# Altium PCB LCD-Controller.PcbDoc (part 1 of 3)
Units mm, origin at the board's own origin, x right, y up, seen from the top; angles counter-clockwise.
Board outline 100.3 x 38.1 mm, 4 copper layers (Top Layer, Signal Layer 1, Signal Layer 2, Bottom Layer), stack 0.778 mm thick; 118 components, 92 nets, 506 pads, 174 vias.
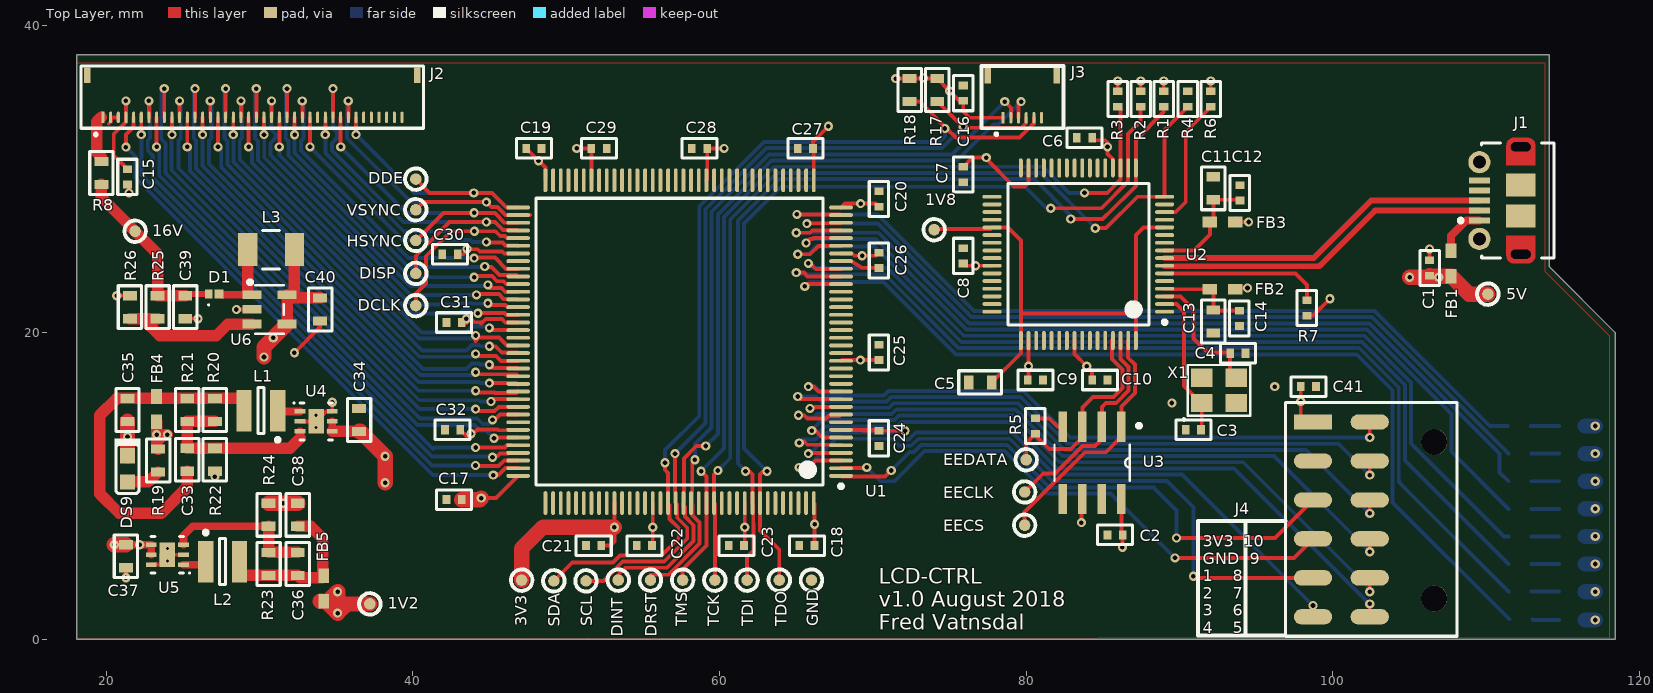
[diagram p0: Top Layer view]
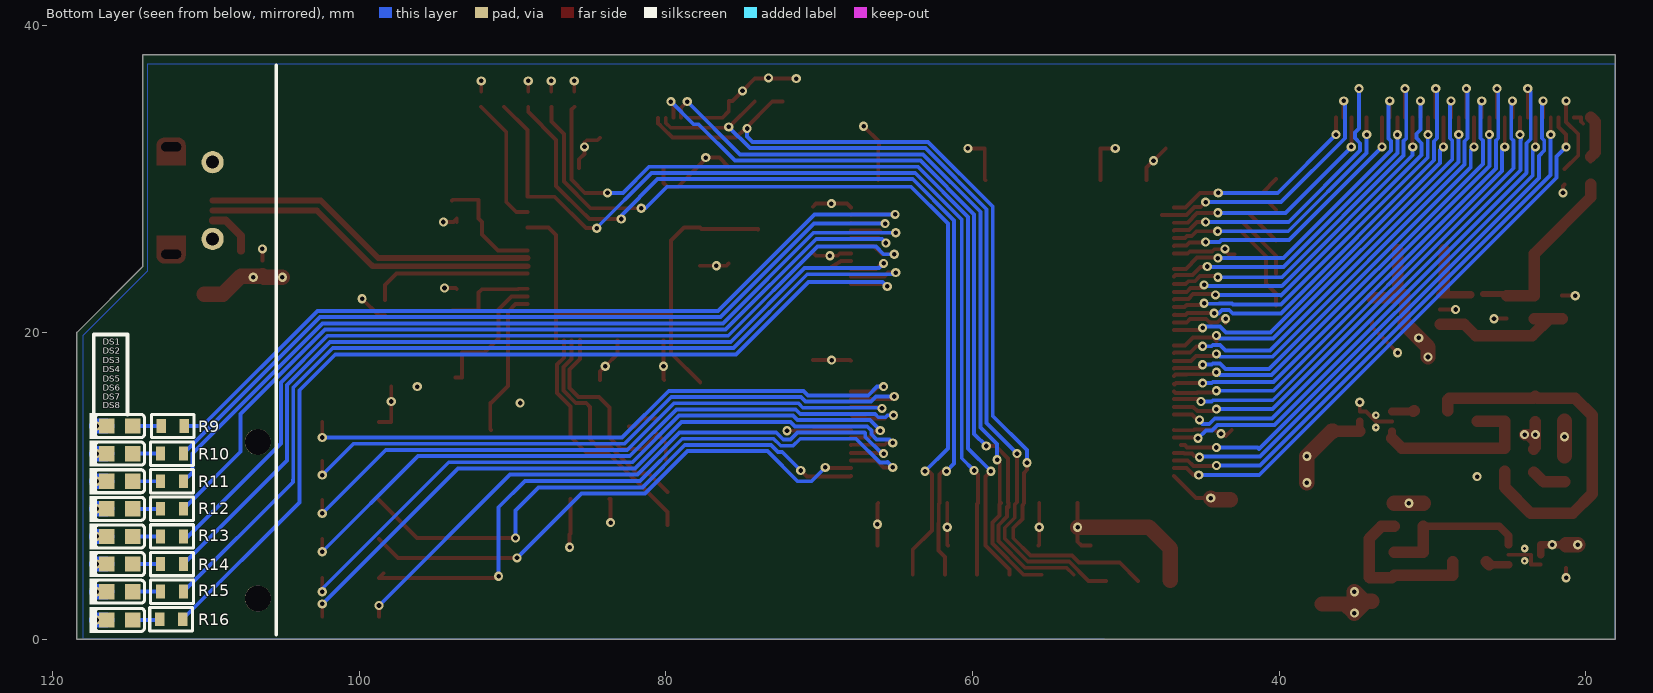
[diagram p1: Bottom Layer view, seen from below]
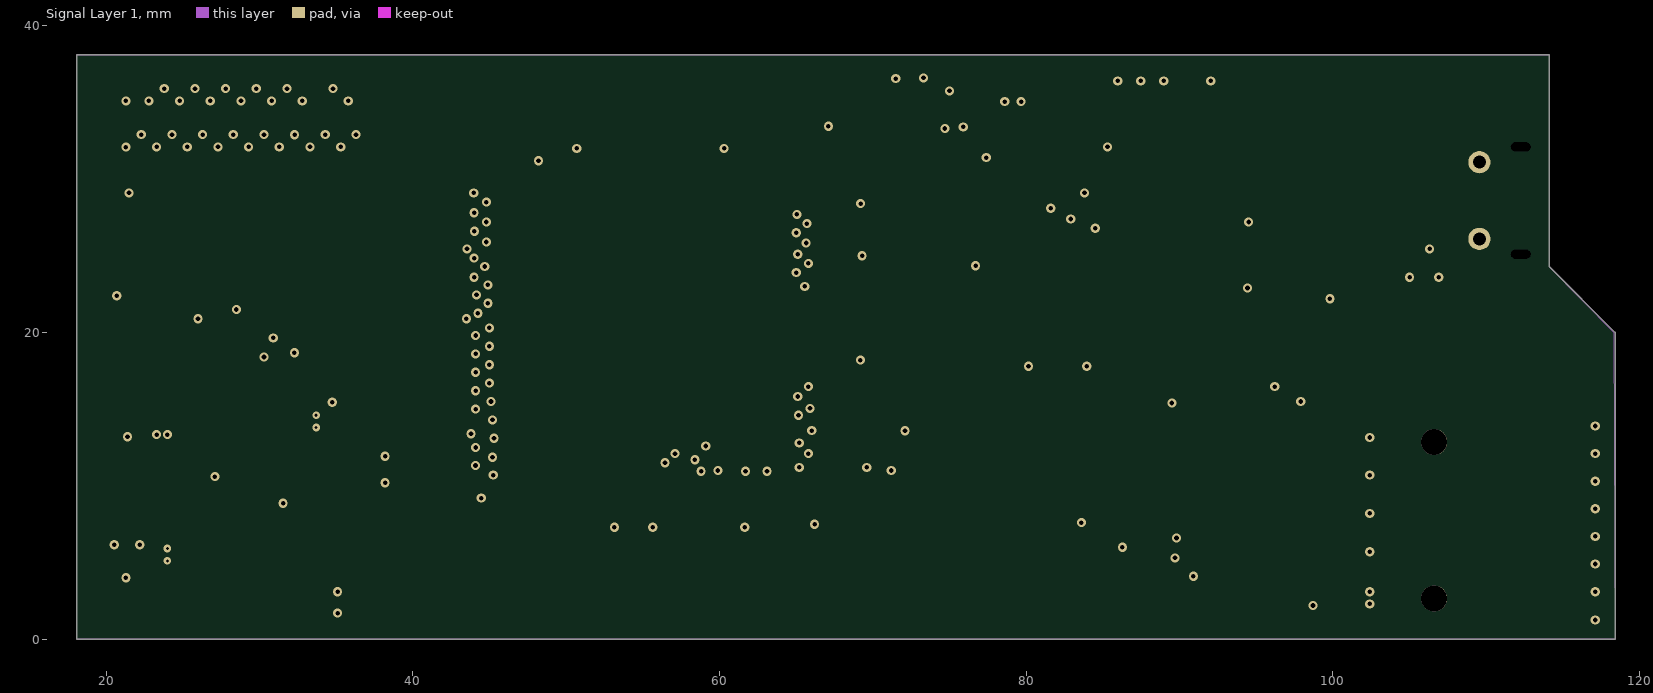
[diagram p2: Signal Layer 1]
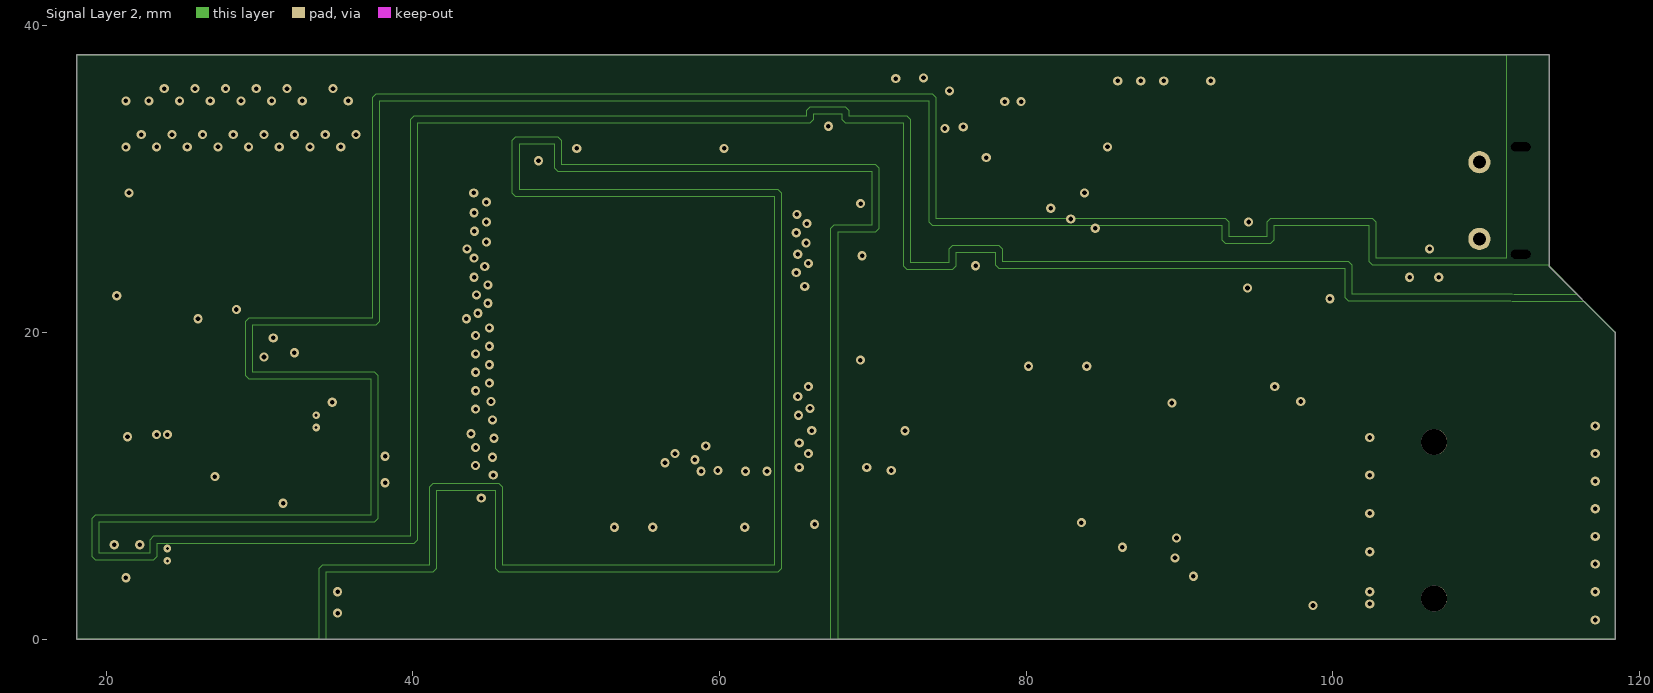
[diagram p3: Signal Layer 2]
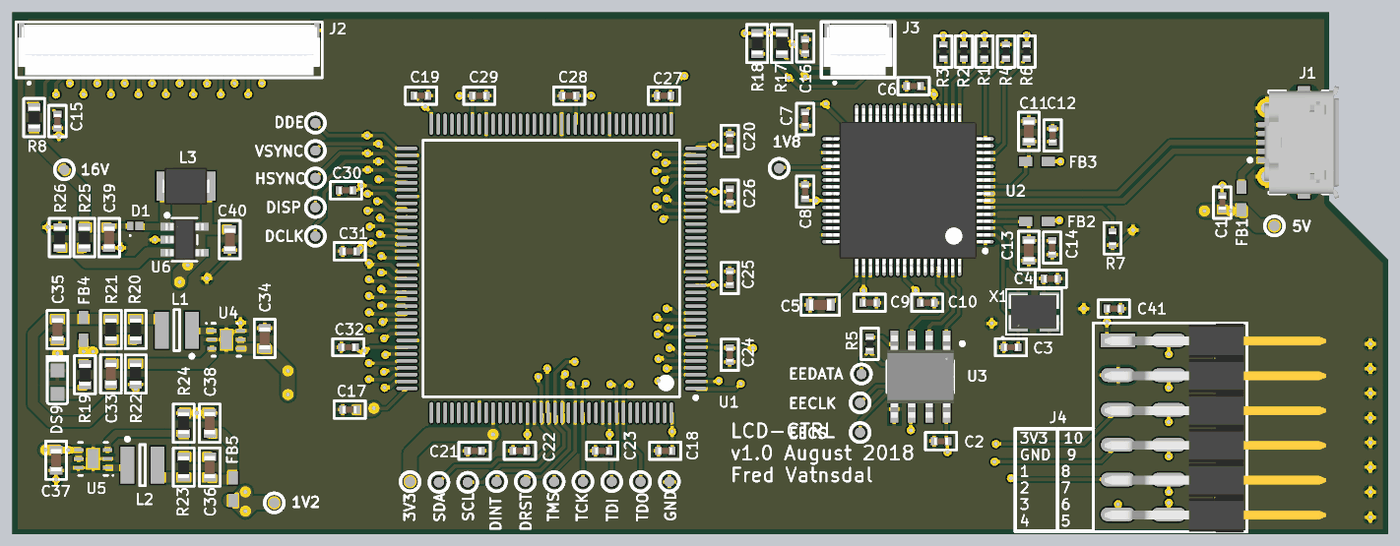
[diagram p5: 3D render of the assembled board from above, using the file's embedded part models]
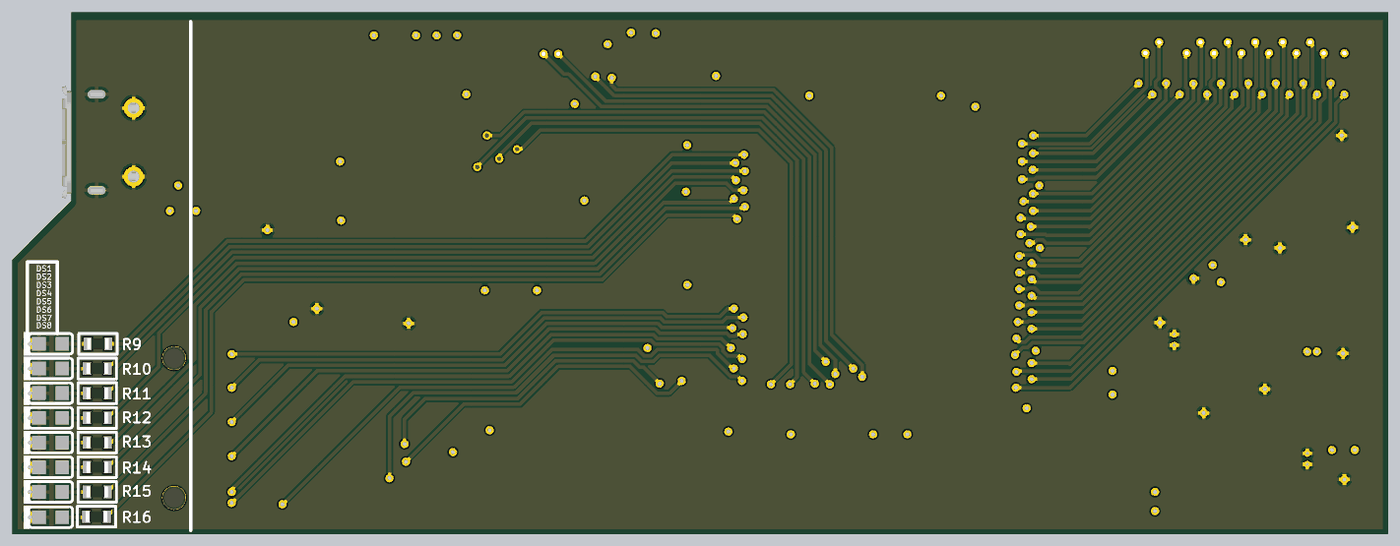
[diagram p6: 3D render of the assembled board from below, using the file's embedded part models]

## Layer stack, top to bottom
Top Solder: solder mask 0.0102, Solder Resist, Dk 3.5
Top Layer: signal copper 0.0356
Dielectric 1: core 0.254, FR408, Dk 3.66
Signal Layer 1: signal copper 0.036
Dielectric 5: prepreg 0.127, Dk 4.2
Signal Layer 2: signal copper 0.036
Dielectric 3: core 0.254, FR408, Dk 4.2
Bottom Layer: signal copper 0.0356
Bottom Solder: solder mask 0.0102, Solder Resist, Dk 3.5

## Board outline
18.1,0 18.1,38.1 114.1,38.1 114.1,24.3 118.4,20 118.4,0

## Design rules (kind name [scope] priority, off if disabled: settings)
BoardOutlineClearance [All] p1: gap=0.381 ignorepadtopadclearanceinfootprint=FALSE except(0.15: Arc-OutlineEdge Arc-CavityEdge Arc-CutoutEdge Arc-SplitBarrior Arc-SplitContinuation Track-OutlineEdge Track-CavityEdge Track-CutoutEdge Track-SplitBarrior Track-SplitContinuation Text-OutlineEdge Text-CavityEdge Text-CutoutEdge Text-SplitBarrior Text-SplitContinuation)
Clearance [All] p1: gap=0.13 ignorepadtopadclearanceinfootprint=FALSE
DiffPairsRouting [All] p1: maxlimit=0.254 minlimit=0.254 mostfreqgap=0.254 toplayer_minwidth=0.381 toplayer_maxwidth=0.381 toplayer_prefwidth=0.381 midlayer1_minwidth=0.381 midlayer1_maxwidth=0.381 midlayer1_prefwidth=0.381 midlayer2_minwidth=0.381 midlayer2_maxwidth=0.381 midlayer2_prefwidth=0.381 bottomlayer_minwidth=0.381 bottomlayer_maxwidth=0.381 bottomlayer_prefwidth=0.381 maxuncoupledlength=12.7
MinimumSolderMaskSliver [All] p1: minsoldermaskwidth=0
NetAntennae [All] p1: netantennaetolerance=0.1
PolygonConnect [All] p1: connectstyle=Relief reliefconductorwidth=0.254 reliefentries=4 polygonreliefangle="90 Angle" airgapwidth=0.254
RoutingVias [All] p1: holewidth=0.3 width=0.6 viastyle="Through Hole" minholewidth=0.3 minwidth=0.6 maxholewidth=0.7 maxwidth=1.27
SilkToSilkClearance [All] p1: silktosilkclearance=0
SilkToSolderMaskClearance [IsPad] p1: minsilkscreentomaskgap=0 clearancetoexposedcopper=TRUE
SolderMaskExpansion [All] p1: expansion=0.102
Width "Schematic Width Constraint" [InNetClass('Power')] p1: maxlimit=1.5 minlimit=0.25 preferedwidth=1 midlayer1_minwidth=0.254 midlayer1_maxwidth=0.254 midlayer1_prefwidth=0.254 midlayer2_minwidth=0.254 midlayer2_maxwidth=0.254 midlayer2_prefwidth=0.254 minimp=50.000000 maximp=50.000000 favimp=50.000000
Width [All] p2: maxlimit=1 minlimit=0.15 preferedwidth=0.254 midlayer1_minwidth=0.254 midlayer1_maxwidth=0.254 midlayer2_minwidth=0.254 midlayer2_maxwidth=0.254 minimp=50.000000 maximp=50.000000 favimp=50.000000
25 further rules are at their usual default settings.

## Classes and differential pairs
net class Power: 1V2 3V3 5V_USB 16V GND NetC33_2 NetC36_2 NetD1_2 NetDS9_1 NetL1_1 NetL2_1 NetR25_1 VCC_1V2 VCC_3V3
net class DIFF90: USB_N USB_P
component class USB-to-JTAG: C1 C2 C3 C4 EECLK EECS EEDATA FB1 J1 R1 R2 R3 R4 R5 R6 R7 TCK TDI TDO TMS U2 U3 X1
component class Power-Management: 1V2 1V8 3V3 5V 16V C5 C6 C7 C8 C9 C10 C11 C12 C13 C14 C17 C18 C19 C20 C21 C22 C23 C24 C25 C26 C27 C28 C29 C30 C31 C32 C33 C34 C35 C36 C37 C38 C39 C40 D1 DS9 FB2 FB3 FB4 FB5 GND L1 L2 L3 R19 R20 R21 R22 R23 R24 R25 R26 U4 U5 U6
component class FPGA: C15 C16 C41 DCLK DDE DINT DISP DRST DS1 DS2 DS3 DS4 DS5 DS6 DS7 DS8 HSYNC J2 J3 J4 R8 R9 R10 R11 R12 R13 R14 R15 R16 R17 R18 SCL SDA U1 VSYNC
differential pair USB: +USB_P -USB_N

## Components (designator, comment, footprint, x,y, rotation, side; value= is the part's Value field where it differs from the comment)
1V2 "TP" TP_0.75DIA 37.2,2.3 r90 top
1V8 "TP" TP_0.75DIA 74,26.7 r90 top
3V3 "TP" TP_0.75DIA 47.1,3.85 r90 top
5V "TP" TP_0.75DIA 110.1,22.5 r0 top
16V "TP" TP_0.75DIA 21.9,26.6 r90 top
C1 "C0402C104K4RACTU" CAP_0402_imperial 106.3,24.2 r90 top
C2 "C0402C104K4RACTU" CAP_0402_imperial 85.8,6.8 r180 top
C3 "C0402C180K3GACTU" CAP_0402_imperial 90.9,13.65 r180 top
C4 "C0402C180K3GACTU" CAP_0402_imperial 93.8,18.65 r0 top
C5 "CAP 3.3uF 10V 0603(1608)" CAP_0603_imperial 77,16.743 r180 top
C6 "C0402C104K4RAC-TU" CAP_0402_imperial 83.8,32.7 r180 top
C7 "C0402C104K4RACTU" CAP_0402_imperial 75.9,30.3 r270 top
C8 "C0402C104K4RACTU" CAP_0402_imperial 75.9,25 r90 top
C9 "C0402C104K4RACTU" CAP_0402_imperial 80.6,16.9 r0 top
C10 "C0402C104K4RACTU" CAP_0402_imperial 84.8,16.9 r0 top
C11 "CAP 4.7uF 10V 0805(2012)" CAP_0603_imperial 92.2,29.4 r90 top
C12 "C0402C104K4RACTU" CAP_0402_imperial 93.935,29.1 r90 top
C13 "CAP 4.7uF 10V 0805(2012)" CAP_0603_imperial 92.2,20.72 r270 top
C14 "C0402C104K4RACTU" CAP_0402_imperial 93.9,20.92 r270 top
C15 "C0402C104K4RACTU" CAP_0402_imperial 21.4,30.15 r270 top
C16 "C0402C104K4RACTU" CAP_0402_imperial 75.9,35.6 r90 top
C17 "C0402C104K4RACTU" CAP_0402_imperial 42.7,9.1 r180 top
C18 "C0402C104K4RACTU" CAP_0402_imperial 65.7,6.1 r180 top
C19 "C0402C104K4RACTU" CAP_0402_imperial 47.9,32 r0 top
C20 "C0402C104K4RACTU" CAP_0402_imperial 70.4,28.7 r90 top
C21 "C0402C104K4RACTU" CAP_0402_imperial 51.8,6.1 r180 top
C22 "C0402C104K4RACTU" CAP_0402_imperial 55.1,6.1 r180 top
C23 "C0402C104K4RACTU" CAP_0402_imperial 61.1,6.1 r180 top
C24 "C0402C104K4RACTU" CAP_0402_imperial 70.4,13.1 r270 top
C25 "C0402C104K4RACTU" CAP_0402_imperial 70.4,18.7 r90 top
C26 "C0402C104K4RACTU" CAP_0402_imperial 70.4,24.7 r270 top
C27 "C0402C104K4RACTU" CAP_0402_imperial 65.6,32 r180 top
C28 "C0402C104K4RACTU" CAP_0402_imperial 58.7,32 r180 top
C29 "C0402C104K4RACTU" CAP_0402_imperial 52.15,32 r0 top
C30 "C0402C104K4RACTU" CAP_0402_imperial 42.427,25.1 r180 top
C31 "C0402C104K4RACTU" CAP_0402_imperial 42.7,20.65 r180 top
C32 "C0402C104K4RACTU" CAP_0402_imperial 42.6,13.65 r180 top
C33 "06035A220JAT2A" CAP_0603_imperial 25.3,11.7 r90 top
C34 "GRM31CR61E106KA12L" CAP_0603_imperial 36.5,14.3 r90 top
C35 "GRM31CR61E106KA12L" CAP_0603_imperial 21.4,14.95 r270 top
C36 "06035A220JAT2A" CAP_0603_imperial 32.5,4.91 r90 top
C37 "GRM31CR61E106KA12L" CAP_0603_imperial 21.3,5.41 r270 top
C38 "GRM31CR61E106KA12L" CAP_0603_imperial 32.5,8.11 r90 top
C39 "GRM31CR61E106KA12L" CAP_0603_imperial 25.162,21.65 r270 top
C40 "GRM188R61A225KE34x" CAP_0603_imperial 33.962,21.5 r270 top
C41 "C0402C104K4RAC-TU" CAP_0402_imperial 98.4,16.47 r180 top
D1 "NSR05F40NXT5G" ONSC-DSN-2-152AC-01_V 27.062,22.5 r90 top
DCLK "TP" TP_0.75DIA 40.2,21.748 r90 top (schematic designator LCD_CLK)
DDE "TP" TP_0.75DIA 40.2,30 r90 top (schematic designator LCD_DE)
DINT "TP" TP_0.75DIA 53.4,3.85 r90 top (schematic designator LCD_INT)
DISP "TP" TP_0.75DIA 40.2,23.85 r90 top (schematic designator LCD_DISP)
DRST "TP" TP_0.75DIA 55.5,3.85 r90 top (schematic designator LCD_RST)
DS1 "APG1608SEKC/T" KING-LED0603-25-ORANGE_V 115.6,13.9 r180 bottom
DS2 "APG1608SEKC/T" KING-LED0603-25-ORANGE_V 115.6,12.1 r180 bottom
DS3 "APG1608SEKC/T" KING-LED0603-25-ORANGE_V 115.6,10.3 r180 bottom
DS4 "APG1608SEKC/T" KING-LED0603-25-ORANGE_V 115.6,8.5 r180 bottom
DS5 "APG1608SEKC/T" KING-LED0603-25-ORANGE_V 115.6,6.7 r180 bottom
DS6 "APG1608SEKC/T" KING-LED0603-25-ORANGE_V 115.6,4.9 r180 bottom
DS7 "APG1608SEKC/T" KING-LED0603-25-ORANGE_V 115.6,3.1 r180 bottom
DS8 "APG1608SEKC/T" KING-LED0603-25-ORANGE_V 115.6,1.254 r180 bottom
DS9 "APG1608CGKC/T" KING-LED0603-25-GREEN_V 21.4,11.103 r270 top
EECLK "TP" TP_0.75DIA 79.9,9.6 r90 top
EECS "TP" TP_0.75DIA 79.9,7.431 r90 top
EEDATA "TP" TP_0.75DIA 80,11.7 r90 top
FB1 "BLM18AG601SN1D" MURA-BLM18-F-H1-CHIP-2_V 107.7,24.5 r270 top
FB2 "BLM18AG601SN1D" MURA-BLM18-F-H1-CHIP-2_V 92.8,22.82 r180 top
FB3 "BLM18AG601SN1D" MURA-BLM18-F-H1-CHIP-2_V 92.8,27.2 r180 top
FB4 "BLM18AG601SN1D" MURA-BLM18-F-H1-CHIP-2_V 23.3,15 r270 top
FB5 "BLM18AG601SN1D" MURA-BLM18-F-H1-CHIP-2_V 34.2,3.3 r270 top
GND "TP" TP_0.75DIA 66,3.85 r90 top
HSYNC "TP" TP_0.75DIA 40.2,26 r90 top
J1 "105017-0001" USB-MICRO-B_V 110.9,28.6 r90 top
J2 "AYF534035" AYF534035 39.151,33.923 r270 top
J3 "AYF530635" AYF530635 79.73,33.594 r270 top
J4 "610112249121" 610112249121 98.7,14.16 r0 top
L1 "SRN3015-2R2M" BOUR-SRN3015-2_V 30.1,14.9 r180 top
L2 "SRN3015-2R2M" BOUR-SRN3015-2_V 27.6,5.053 r0 top
L3 "CM322522-100KL" BOUR-CM322522_V 30.762,25.4 r180 top
R1 "5K1 1% 0402(1005)" RES_0402_imperial 88.965,35.219 r90 top
R2 "5K1 1% 0402(1005)" RES_0402_imperial 87.465,35.219 r90 top
R3 "5K1 1% 0402(1005)" RES_0402_imperial 85.965,35.219 r90 top
R4 "2K2 1% 0402(1005)" RES_0402_imperial 90.538,35.219 r270 top
R5 "2K2 1% 0402(1005)" RES_0402_imperial 80.6,13.9 r90 top
R6 "2K2 1% 0402(1005)" RES_0402_imperial 92.038,35.219 r90 top
R7 "RC0402FR-0712KL" RES_0402_imperial 98.3,21.6 r90 top
R8 "390R 1% 2512(6432)" RES_0603_imperial 19.7,30.4 r270 top
R9 "220R 1% 0603(1608)" RES_0603_imperial 112.15,13.9 r180 bottom
R10 "220R 1% 0603(1608)" RES_0603_imperial 112.2,12.1 r180 bottom
R11 "220R 1% 0603(1608)" RES_0603_imperial 112.2,10.3 r180 bottom
R12 "220R 1% 0603(1608)" RES_0603_imperial 112.2,8.5 r180 bottom
R13 "220R 1% 0603(1608)" RES_0603_imperial 112.2,6.7 r180 bottom
R14 "220R 1% 0603(1608)" RES_0603_imperial 112.2,4.9 r180 bottom
R15 "220R 1% 0603(1608)" RES_0603_imperial 112.2,3.1 r180 bottom
R16 "220R 1% 0603(1608)" RES_0603_imperial 112.25,1.3 r180 bottom
R17 "4K7 1% 0603(1608)" RES_0603_imperial 74.203,35.8 r90 top
R18 "4K7 1% 0603(1608)" RES_0603_imperial 72.4,35.8 r90 top
R19 "220R 1% 0603(1608)" RES_0603_imperial 23.4,11.65 r90 top
R20 "820K 1% 0603(1608)" RES_0603_imperial 27.1,14.95 r90 top
R21 "820K 1% 0603(1608)" RES_0603_imperial 25.3,14.95 r90 top
R22 "180K 1% 0603(1608)" RES_0603_imperial 27.1,11.7 r90 top
R23 "180K 1% 0603(1608)" RES_0603_imperial 30.6,4.91 r270 top
R24 "180K 1% 0603(1608)" RES_0603_imperial 30.6,8.11 r270 top
R25 "56K 1% 0603(1608)" RES_0603_imperial 23.362,21.65 r90 top
R26 "4K7 1% 0603(1608)" RES_0603_imperial 21.562,21.65 r270 top
SCL "TP" TP_0.75DIA 51.3,3.8 r90 top (schematic designator I2C_SCL)
SDA "TP" TP_0.75DIA 49.2,3.8 r90 top (schematic designator I2C_SDA)
TCK "TP" TP_0.75DIA 59.7,3.85 r90 top
TDI "TP" TP_0.75DIA 61.8,3.85 r0 top
TDO "TP" TP_0.75DIA 63.9,3.85 r90 top
TMS "TP" TP_0.75DIA 57.6,3.85 r90 top
U1 "LCMXO2-7000HE-4TG144C" TQFP144_L 57.4,19.4 r180 top
U2 "FT2232HL" FTDI-LQFP-64_L 83.4,25.1 r180 top
U3 "93LCS56-XSN" SOIC8-N_MC 84.3,11.5 r270 top value=Value
U4 "TPS62290DRVR" DRV6-1600X1000TP 33.7,14.2 r0 top
U5 "TPS62290DRVR" DRV6-1600X1000TP 24,5.51 r180 top
U6 "MIC2288YD5" TSOT-23-5_D5 30.662,21.5 r0 top value=Value
VSYNC "TP" TP_0.75DIA 40.2,28 r90 top
X1 "7M-12.000MAAJ-T" 7M-12.000MAAJ-T 94.607,14.574 r90 top

## Footprints (in the part's own frame and the unit in brackets; to place one, negate y for a bottom-side part, rotate by r counter-clockwise, add the part's x,y. Pads: shape width x height; smd on the part's side, far side on the other; paste and mask are expansions set on the pad)
7M-12.000MAAJ-T [mil]
  rect 47x55 smd paste-23.5 mask+0: 1(32.5,124.5) 2(32.5,35.5) 3(97.5,35.5) 4(97.5,124.5)
  silkscreen extent -13,0 130,173, body extent 14,8 116,152, height 32
610112249121 [mm]
  rect 2.5x1 smd: 1(0,0)
  oval 2.5x1 smd: 2(0,-2.54) 3(0,-5.08) 4(0,-7.62) 5(0,-10.16) 6(0,-12.7) 7(3.7,-12.7) 8(3.7,-10.16) 9(3.7,-7.62) 10(3.7,-5.08) 11(3.7,-2.54) 12(3.7,0)
  round 1.7 hole 1.7: 4(7.9,-11.5) 4(7.9,-1.3)
  silkscreen extent -1.8,-13.97 9.4,1.27, body extent -0.99,-14.02 15.17,1.22, height 5.04
AYF530635 [mm]
  rect 0.75x0.2 smd: 1(-0.406,-1.23)
  oval 0.75x0.2 smd: 2(-0.406,-0.73) 3(-0.406,-0.23) 4(-0.406,0.27) 5(-0.406,0.77) 6(-0.406,1.27)
  rect 1x0.4 smd: 7(-3.15,2.261) 8(-3.15,-2.235)
  silkscreen extent -3.78,-2.64 0.72,2.69, body extent -3.6,-2.47 0.1,2.53, height 1
AYF534035 [mm]
  rect 0.75x0.2 smd: 1(-0.102,-19.351)
  oval 0.75x0.2 smd: 2(-0.102,-18.851) 3(-0.102,-18.351) 4(-0.102,-17.851) 5(-0.102,-17.351) 6(-0.102,-16.851) 7(-0.102,-16.351) 8(-0.102,-15.851) 9(-0.102,-15.351) 10(-0.102,-14.851) 11(-0.102,-14.351) 12(-0.102,-13.851) 13(-0.102,-13.351) 14(-0.102,-12.851) 15(-0.102,-12.351) 16(-0.102,-11.851) 17(-0.102,-11.351) 18(-0.102,-10.851) 19(-0.102,-10.351) 20(-0.102,-9.851) 21(-0.102,-9.351) 22(-0.102,-8.851) 23(-0.102,-8.351) 24(-0.102,-7.851) 25(-0.102,-7.351) 26(-0.102,-6.851) 27(-0.102,-6.351) 28(-0.102,-5.851) 29(-0.102,-5.351) 30(-0.102,-4.851) 31(-0.102,-4.351) 32(-0.102,-3.851) 33(-0.102,-3.351) 34(-0.102,-2.851) 35(-0.102,-2.351) 36(-0.102,-1.851) 37(-0.102,-1.351) 38(-0.102,-0.851) 39(-0.102,-0.351) 40(-0.102,0.149)
  rect 1x0.4 smd: 7(-2.845,1.143) 8(-2.845,-20.371)
  silkscreen extent -3.45,-20.78 1.07,1.55, body extent -3.27,-20.6 4.32,1.4, height 1
BOUR-CM322522_V [mm] "Inductor, 2-Leads, Body 3.2x2.5mm, Pitch 3.05mm"
  rect 1.25x2.15 smd: 1(-1.525,0) 2(1.525,0)
  silkscreen extent -0.54,-1.25 0.54,1.25, body extent -1.77,-1.35 1.77,1.35, height 2.4
BOUR-SRN3015-2_V [mm] "SMD, 2-Leads, Body 3x3mm, Height 1.5mm"
  rect 1x2.7 smd: 1(-1.1,0) 2(1.1,0)
  silkscreen extent -1.23,-1.5 0.2,2.02, body extent -1.5,-1.5 1.5,1.5, height 1.5
CAP_0402_imperial [mm]
  rect 0.5x0.6 smd: 1(-0.5,0) 2(0.5,0)
  silkscreen extent -1.14,-0.64 1.14,0.64, body extent -0.5,-0.25 0.5,0.25, height 0.5
CAP_0603_imperial [mm]
  rect 0.6x0.9 smd: 1(-0.75,0) 2(0.75,0)
  silkscreen extent -1.4,-0.76 1.4,0.76, body extent -0.8,-0.4 0.8,0.4, height 0.8
DRV6-1600X1000TP [mm] "SON, 6-Leads, Body 2x2mm, Pitch 0.65mm, Thermal Pad 1.6x1mm, TI Recommended"
  rect 0.7x0.3 smd paste-0.025 mask+0.07: 1(-1.05,0.65) 2(-1.05,0) 3(-1.05,-0.65) 4(1.05,-0.65) 5(1.05,0) 6(1.05,0.65)
  rect 1x1.6 smd paste-0.5 mask+0.07: 7(0,0)
  silkscreen extent -1.5,-1.2 1.05,1.25, body extent -1.05,-1.05 1.05,1.05, height 0.8
FTDI-LQFP-64_L [mm] "QFP, 64-Leads, Body 10.00x10.00mm, Pitch 0.50mm, IPC High Density"
  oval 1.25x0.25 smd: 1(-5.625,3.75) 2(-5.625,3.25) 3(-5.625,2.75) 4(-5.625,2.25) 5(-5.625,1.75) 6(-5.625,1.25) 7(-5.625,0.75) 8(-5.625,0.25) 9(-5.625,-0.25) 10(-5.625,-0.75) 11(-5.625,-1.25) 12(-5.625,-1.75) 13(-5.625,-2.25) 14(-5.625,-2.75) 15(-5.625,-3.25) 16(-5.625,-3.75) 33(5.625,-3.75) 34(5.625,-3.25) 35(5.625,-2.75) 36(5.625,-2.25) 37(5.625,-1.75) 38(5.625,-1.25) 39(5.625,-0.75) 40(5.625,-0.25) 41(5.625,0.25) 42(5.625,0.75) 43(5.625,1.25) 44(5.625,1.75) 45(5.625,2.25) 46(5.625,2.75) 47(5.625,3.25) 48(5.625,3.75)
  oval 0.25x1.25 smd: 17(-3.75,-5.625) 18(-3.25,-5.625) 19(-2.75,-5.625) 20(-2.25,-5.625) 21(-1.75,-5.625) 22(-1.25,-5.625) 23(-0.75,-5.625) 24(-0.25,-5.625) 25(0.25,-5.625) 26(0.75,-5.625) 27(1.25,-5.625) 28(1.75,-5.625) 29(2.25,-5.625) 30(2.75,-5.625) 31(3.25,-5.625) 32(3.75,-5.625) 49(3.75,5.625) 50(3.25,5.625) 51(2.75,5.625) 52(2.25,5.625) 53(1.75,5.625) 54(1.25,5.625) 55(0.75,5.625) 56(0.25,5.625) 57(-0.25,5.625) 58(-0.75,5.625) 59(-1.25,5.625) 60(-1.75,5.625) 61(-2.25,5.625) 62(-2.75,5.625) 63(-3.25,5.625) 64(-3.75,5.625)
  silkscreen extent -5.75,-4.6 4.6,4.6, body extent -6,-6 6,6, height 1.6
KING-LED0603-25-GREEN_V [mm] "LED, SMT, Body 1.6 x 0.8 mm, 0.25mm Thickness"
  rect 1x1 smd paste+0 mask+0: 1(0.85,0) 2(-0.85,0)
  silkscreen extent -1.97,-0.85 1.6,0.85, body extent -0.8,-0.4 0.8,0.4, height 0.25
KING-LED0603-25-ORANGE_V [mm] "LED, SMT, Body 1.6 x 0.8 mm, 0.25mm Thickness"
  rect 1x1 smd paste+0 mask+0: 1(0.85,0) 2(-0.85,0)
  silkscreen extent -1.97,-0.85 1.6,0.85, body extent -0.8,-0.4 0.8,0.4, height 0.25
MURA-BLM18-F-H1-CHIP-2_V [mm] "Chip Ferrite Bead, 2-Leads, Body 1.6x0.8mm, Height 0.95mm, Flow"
  rect 0.95x0.7 smd: 1(-0.825,0) 2(0.825,0)
  body extent -0.8,-0.4 0.8,0.4, height 0.95
ONSC-DSN-2-152AC-01_V [mm] "DSN, 2-Leads, Body 1x0.6mm"
  rect 0.6x0.47 smd: 1(0,0.365)
  rect 0.6x0.6 smd: 2(0,-0.3)
  silkscreen extent -0.75,0.32 -0.65,0.41, body extent -0.3,-0.5 0.3,0.5, height 0.31
RES_0402_imperial [mm]
  rect 0.5x0.6 smd: 1(-0.5,0) 2(0.5,0)
  silkscreen extent -1.14,-0.64 1.14,0.64, body extent -0.5,-0.25 0.5,0.25, height 0.35
RES_0603_imperial [mm]
  rect 0.6x0.9 smd: 1(-0.75,0) 2(0.75,0)
  silkscreen extent -1.4,-0.76 1.4,0.76, body extent -0.8,-0.4 0.8,0.4, height 0.45
SOIC8-N_MC [mil]
  rect 78x22 smd: 1(-93,75) 2(-93,25) 3(-93,-25) 4(-93,-75) 5(93,-75) 6(93,-25) 7(93,25) 8(93,75)
  silkscreen extent -100,-97 46,125, body extent -118,-96 118,97, height 69
TP_0.75DIA [mm]
  round 0.75 smd: 1(0,0)
  silkscreen extent -0.7,-0.7 0.7,0.7
TQFP144_L [mm] "Thin QFP, 144-Leads, Body 20x20mm, Pitch 0.5mm, IPC High Density"
  oval 1.55x0.25 smd: 1(-10.525,8.75) 2(-10.525,8.25) 3(-10.525,7.75) 4(-10.525,7.25) 5(-10.525,6.75) 6(-10.525,6.25) 7(-10.525,5.75) 8(-10.525,5.25) 9(-10.525,4.75) 10(-10.525,4.25) 11(-10.525,3.75) 12(-10.525,3.25) 13(-10.525,2.75) 14(-10.525,2.25) 15(-10.525,1.75) 16(-10.525,1.25) 17(-10.525,0.75) 18(-10.525,0.25) 19(-10.525,-0.25) 20(-10.525,-0.75) 21(-10.525,-1.25) 22(-10.525,-1.75) 23(-10.525,-2.25) 24(-10.525,-2.75) 25(-10.525,-3.25) 26(-10.525,-3.75) 27(-10.525,-4.25) 28(-10.525,-4.75) 29(-10.525,-5.25) 30(-10.525,-5.75) 31(-10.525,-6.25) 32(-10.525,-6.75) 33(-10.525,-7.25) 34(-10.525,-7.75) 35(-10.525,-8.25) 36(-10.525,-8.75) 73(10.525,-8.75) 74(10.525,-8.25) 75(10.525,-7.75) 76(10.525,-7.25) 77(10.525,-6.75) 78(10.525,-6.25) 79(10.525,-5.75) 80(10.525,-5.25) 81(10.525,-4.75) 82(10.525,-4.25) 83(10.525,-3.75) 84(10.525,-3.25) 85(10.525,-2.75) 86(10.525,-2.25) 87(10.525,-1.75) 88(10.525,-1.25) 89(10.525,-0.75) 90(10.525,-0.25) 91(10.525,0.25) 92(10.525,0.75) 93(10.525,1.25) 94(10.525,1.75) 95(10.525,2.25) 96(10.525,2.75) 97(10.525,3.25) 98(10.525,3.75) 99(10.525,4.25) 100(10.525,4.75) 101(10.525,5.25) 102(10.525,5.75) 103(10.525,6.25) 104(10.525,6.75) 105(10.525,7.25) 106(10.525,7.75) 107(10.525,8.25) 108(10.525,8.75)
  oval 0.25x1.55 smd: 37(-8.75,-10.525) 38(-8.25,-10.525) 39(-7.75,-10.525) 40(-7.25,-10.525) 41(-6.75,-10.525) 42(-6.25,-10.525) 43(-5.75,-10.525) 44(-5.25,-10.525) 45(-4.75,-10.525) 46(-4.25,-10.525) 47(-3.75,-10.525) 48(-3.25,-10.525) 49(-2.75,-10.525) 50(-2.25,-10.525) 51(-1.75,-10.525) 52(-1.25,-10.525) 53(-0.75,-10.525) 54(-0.25,-10.525) 55(0.25,-10.525) 56(0.75,-10.525) 57(1.25,-10.525) 58(1.75,-10.525) 59(2.25,-10.525) 60(2.75,-10.525) 61(3.25,-10.525) 62(3.75,-10.525) 63(4.25,-10.525) 64(4.75,-10.525) 65(5.25,-10.525) 66(5.75,-10.525) 67(6.25,-10.525) 68(6.75,-10.525) 69(7.25,-10.525) 70(7.75,-10.525) 71(8.25,-10.525) 72(8.75,-10.525) 109(8.75,10.525) 110(8.25,10.525) 111(7.75,10.525) 112(7.25,10.525) 113(6.75,10.525) 114(6.25,10.525) 115(5.75,10.525) 116(5.25,10.525) 117(4.75,10.525) 118(4.25,10.525) 119(3.75,10.525) 120(3.25,10.525) 121(2.75,10.525) 122(2.25,10.525) 123(1.75,10.525) 124(1.25,10.525) 125(0.75,10.525) 126(0.25,10.525) 127(-0.25,10.525) 128(-0.75,10.525) 129(-1.25,10.525) 130(-1.75,10.525) 131(-2.25,10.525) 132(-2.75,10.525) 133(-3.25,10.525) 134(-3.75,10.525) 135(-4.25,10.525) 136(-4.75,10.525) 137(-5.25,10.525) 138(-5.75,10.525) 139(-6.25,10.525) 140(-6.75,10.525) 141(-7.25,10.525) 142(-7.75,10.525) 143(-8.25,10.525) 144(-8.75,10.525)
  silkscreen extent -10.65,-9.35 9.35,9.55, body extent -10,-10 10,10, height 1.6
TSOT-23-5_D5 [mil]
  rect 48x22 smd mask+0: 1(-45,37.4) 2(-45,0) 3(-45,-37.4) 4(45,-37.4) 5(45,37.4)
  silkscreen extent -55,-62 36,75, body extent -55,-57 55,57, height 39
USB-MICRO-B_V [mm] "USB, MICRO B, Body 7.491x4.695 mm, Pitch 0.65 mm"
  rect 0.4x1.35 smd: 1(-1.3,1.35) 2(-0.65,1.35) 3(0,1.35) 4(0.65,1.35) 5(1.3,1.35)
  round 1.45 hole 0.85: 6(-2.5,1.35) 7(2.5,1.35)
  rrect50% 0x0 hole 0.6 slot 1.3 at 90 deg: 8(-3.5,-1.35) 11(3.5,-1.35)
  rect 1.5x1.9 smd: 9(-1,-1.35) 10(1,-1.35)
  Top Layer circle w0.5: c-3.6,-1.8 r0.25
  Top Layer circle w0.5: c-3.6,-0.9 r0.25
  Top Layer circle w0.5: c3.6,-1.8 r0.25
  Top Layer circle w0.5: c3.6,-0.9 r0.25
  Top Layer region: -3.6,-1.8 -3.6,-0.9 -4.1,-0.9 -4.1,-1.8
  Top Layer region: 3.6,-0.9 3.6,-1.8 4.1,-1.8 4.1,-0.9
  Top Layer region: 2.3,-0.4 2.3,-2.3 3.6,-2.3 3.6,-0.4
  Top Layer region: -2.3,-2.3 -2.3,-0.4 -3.6,-0.4 -3.6,-2.3
  silkscreen extent -3.75,-3.5 3.75,2.7, body extent -4.1,-3.9 4.1,1.5, height 2.67

## Part data
C1 C2 C7 C8 C9 C10 C12 C14 C15 C16 C17 C18 C19 C20 C21 C22 C23 C24 C25 C26 C27 C28 C29 C30 C31 C32: library part C0402C104K4RAC-TU, "CAP CER 0.1UF 16V X7R 0402", Capacitance=100nF, Case/Package=0402, Case Code (Metric)=1005, Dielectric=X7R, Dielectric Material=Ceramic, Manufacturer=KEMET, Max Operating Temperature=125°C, Min Operating Temperature=-55°C, Package Quantity=1, Supplier Part Number 1=399-3521-6-ND, Tolerance=10%, Voltage=16V, Case Code (Imperial)=0402, ComponentLink1Description=https://datasheet.ciiva.com/28645/1851736-28645381.pdf, ComponentLink1URL=https://datasheet.ciiva.com/28645/1851736-28645381.pdf, ComponentLink2Description=https://datasheet.ciiva.com/5418/kem-c1002-x7r-smd-5418136.pdf, ComponentLink2URL=https://datasheet.ciiva.com/5418/kem-c1002-x7r-smd-5418136.pdf, ComponentLink3Description=https://datasheet.ciiva.com/14586/70095383-14586056.pdf, ComponentLink3URL=https://datasheet.ciiva.com/14586/70095383-14586056.pdf, ComponentLink4Description=https://datasheet.ciiva.com/18100/getdatasheetpartid-37082-18100986.pdf, ComponentLink4URL=https://datasheet.ciiva.com/18100/getdatasheetpartid-37082-18100986.pdf, ComponentLink5Description=https://datasheet.ciiva.com/14603/70095383-14603039.pdf, ComponentLink5URL=https://datasheet.ciiva.com/14603/70095383-14603039.pdf, Contact Plating=Tin,Matte, Depth=0.5mm, Dissipation Factor=3.5%, Height=0.5mm, Lead Pitch=0.3mm, Length=1mm, Manufacturer Part Number=C0402C104K4RAC-TU, Mount="Surface Mount,PCB", Number of Pins=2, Packaging="Tape and Reel", Radiation Hardening=No, REACH SVHC="No SVHC", Stock 1=0, Supplier 1=Digi-Key, Termination=SMD/SMT, Thickness=0.022inch, Voltage Rating=16V, Voltage Rating (DC)=16V, Width=0.02inch
C3 C4: "CAP CER 18PF 25V NP0 0402", Capacitance=18pF, Case/Package=0402, Case Code (Metric)=1005, Dielectric=C0G, Dielectric Material=Ceramic, Manufacturer=KEMET, Max Operating Temperature=125°C, Min Operating Temperature=-55°C, Package Quantity=10000, Supplier Part Number 1=C0402C180K3GACTU-ND, Tolerance=10%, Voltage Rating=25V, Case Code (Imperial)=0402, ComponentLink1Description=https://datasheet.ciiva.com/13376/kem-c1003-c0g-smd-356956-13376925.pdf, ComponentLink1URL=https://datasheet.ciiva.com/13376/kem-c1003-c0g-smd-356956-13376925.pdf, Depth=0.5mm, Dissipation Factor=0.1%, Height=0.5mm, Lead Free="Lead Free", Lead Pitch=0.3mm, Length=1mm, Manufacturer Part Number=C0402C180K3GACTU, Mount="Surface Mount", Packaging="Tape and Reel", Stock 1=0, Supplier 1=Digi-Key, Termination=SMD/SMT, Thickness=0.022inch, Voltage Rating (DC)=25V, Width=0.02inch
C5: library part C0603C335M9PACTU, "CAP CER 3.3UF 6.3V X5R 0603", Capacitance=3.3uF, Case/Package=0603, Case Code (Metric)=1608, Dielectric=X5R, Dielectric Material=Ceramic, Manufacturer=KEMET, Max Operating Temperature=85°C, Min Operating Temperature=-55°C, Package Quantity=1, Supplier Part Number 1=399-5502-6-ND, Tolerance=20%, Voltage=6.3V, Case Code (Imperial)=0603, ComponentLink1Description=https://datasheet.ciiva.com/7823/1732705-7823760.pdf, ComponentLink1URL=https://datasheet.ciiva.com/7823/1732705-7823760.pdf, ComponentLink2Description=https://datasheet.ciiva.com/146/docfinderpartnumber-c0603c335m9pactu-146661.pdf, ComponentLink2URL=https://datasheet.ciiva.com/146/docfinderpartnumber-c0603c335m9pactu-146661.pdf, Depth=0.8mm, Dissipation Factor=5%, Height=0.8mm, Lead Free="Lead Free", Length=1.6mm, Manufacturer Part Number=C0603C335M9PACTU, Mount="Surface Mount,PCB", Number of Pins=2, Packaging="Tape and Reel", Pricing 1="1=0.28, 10=0.194, 100=0.0983, 500=0.06728, 1000=0.05951 (USD)", Radiation Hardening=No, REACH SVHC="No SVHC", Stock 1=0, Supplier 1=Digi-Key, Termination=SMD/SMT, Thickness=0.035inch, Voltage Rating=6.3V, Voltage Rating (DC)=6.3V, Width=0.031inch
C6 C41: "CAP CER 0.1UF 16V X7R 0402", Capacitance=100nF, Case/Package=0402, Case Code (Metric)=1005, Dielectric=X7R, Dielectric Material=Ceramic, Manufacturer=KEMET, Max Operating Temperature=125°C, Min Operating Temperature=-55°C, Package Quantity=1, Supplier Part Number 1=399-3521-6-ND, Tolerance=10%, Voltage=16V, Case Code (Imperial)=0402, ComponentLink1Description=https://datasheet.ciiva.com/28645/1851736-28645381.pdf, ComponentLink1URL=https://datasheet.ciiva.com/28645/1851736-28645381.pdf, ComponentLink2Description=https://datasheet.ciiva.com/5418/kem-c1002-x7r-smd-5418136.pdf, ComponentLink2URL=https://datasheet.ciiva.com/5418/kem-c1002-x7r-smd-5418136.pdf, ComponentLink3Description=https://datasheet.ciiva.com/14586/70095383-14586056.pdf, ComponentLink3URL=https://datasheet.ciiva.com/14586/70095383-14586056.pdf, ComponentLink4Description=https://datasheet.ciiva.com/18100/getdatasheetpartid-37082-18100986.pdf, ComponentLink4URL=https://datasheet.ciiva.com/18100/getdatasheetpartid-37082-18100986.pdf, ComponentLink5Description=https://datasheet.ciiva.com/14603/70095383-14603039.pdf, ComponentLink5URL=https://datasheet.ciiva.com/14603/70095383-14603039.pdf, Contact Plating=Tin,Matte, Depth=0.5mm, Dissipation Factor=3.5%, Height=0.5mm, Lead Pitch=0.3mm, Length=1mm, Manufacturer Part Number=C0402C104K4RAC-TU, Mount="Surface Mount,PCB", Number of Pins=2, Packaging="Tape and Reel", Radiation Hardening=No, REACH SVHC="No SVHC", Stock 1=0, Supplier 1=Digi-Key, Termination=SMD/SMT, Thickness=0.022inch, Voltage Rating=16V, Voltage Rating (DC)=16V, Width=0.02inch
C11 C13: library part GRM188R61E475KE11D, "4.7µF ±10% 25V X5R Ceramic Capacitor -55°C ~ 85°C Surface Mount, MLCC 0603 (1608 Metric) 0.063\" L x 0.031\" W (1.60mm x 0.80mm)", Capacitance=4.7uF, Case/Package=0603, Case Code (Metric)=1608, Dielectric=X5R, Manufacturer=Murata, Max Operating Temperature=85°C, Min Operating Temperature=-55°C, Package Quantity=4000, Supplier Part Number 1=490-7203-6-ND, Tolerance=10%, Voltage=25V, Case Code (Imperial)=0603, ComponentLink1Description=https://datasheet.ciiva.com/46444/1769893-46444982.pdf, ComponentLink1URL=https://datasheet.ciiva.com/46444/1769893-46444982.pdf, ComponentLink2Description=https://datasheet.ciiva.com/46444/1769893-46444983.pdf, ComponentLink2URL=https://datasheet.ciiva.com/46444/1769893-46444983.pdf, ComponentLink3Description=https://datasheet.ciiva.com/14891/partnumbering-e-01-14891102.pdf, ComponentLink3URL=https://datasheet.ciiva.com/14891/partnumbering-e-01-14891102.pdf, ComponentLink4Description=https://datasheet.ciiva.com/14891/partnumbering-e-01-14891103.pdf, ComponentLink4URL=https://datasheet.ciiva.com/14891/partnumbering-e-01-14891103.pdf, Depth=0.8mm, Height=0.8mm, Lead Free="Lead Free", Length=1.6mm, Manufacturer Part Number=GRM188R61E475KE11D, Material=Ceramic, Mount="Surface Mount", Packaging="Cut Tape", Pricing 1="1=0.46, 10=0.323, 100=0.1937, 500=0.14524, 1000=0.12265 (USD)", REACH SVHC="No SVHC", Stock 1=25738, Supplier 1=Digi-Key, Thickness=0.031inch, Voltage Rating=25V, Voltage Rating (DC)=25V, Width=0.031inch
C33 C36: library part C1608C0G1H220J080AA, "CAP CER 22PF 50V C0G 0603", Capacitance=22pF, Case/Package=0603, Case Code (Metric)=1608, Dielectric=C0G, Dielectric Material=Ceramic, Manufacturer=TDK, Max Operating Temperature=125°C, Min Operating Temperature=-55°C, Package Quantity=1, Supplier Part Number 1=445-1273-6-ND, Temperature Coefficient=30ppm/°C, Tolerance=5%, Voltage=50V, Case Code (Imperial)=0603, ComponentLink1Description=https://datasheet.ciiva.com/6293/tdkmlcccaprange-6293701.pdf, ComponentLink1URL=https://datasheet.ciiva.com/6293/tdkmlcccaprange-6293701.pdf, ComponentLink2Description=https://datasheet.ciiva.com/17487/e412-c-17487461.pdf, ComponentLink2URL=https://datasheet.ciiva.com/17487/e412-c-17487461.pdf, ComponentLink3Description=https://datasheet.ciiva.com/22694/1796654-22694102.pdf, ComponentLink3URL=https://datasheet.ciiva.com/22694/1796654-22694102.pdf, ComponentLink4Description=https://datasheet.ciiva.com/6293/tdkmlcccaprange-6293704.pdf, ComponentLink4URL=https://datasheet.ciiva.com/6293/tdkmlcccaprange-6293704.pdf, ComponentLink5Description=https://datasheet.ciiva.com/24218/c1608c0g1h220j080aa-264689-24218568.pdf, ComponentLink5URL=https://datasheet.ciiva.com/24218/c1608c0g1h220j080aa-264689-24218568.pdf, ComponentLink6Description=https://datasheet.ciiva.com/28576/1744655-28576921.pdf, ComponentLink6URL=https://datasheet.ciiva.com/28576/1744655-28576921.pdf, ComponentLink7Description=https://datasheet.ciiva.com/7975/1796654-7975034.pdf, ComponentLink7URL=https://datasheet.ciiva.com/7975/1796654-7975034.pdf, ComponentLink8Description=https://datasheet.ciiva.com/26946/getdatasheetpartid-741952-26946507.pdf, ComponentLink8URL=https://datasheet.ciiva.com/26946/getdatasheetpartid-741952-26946507.pdf, ComponentLink9Description=https://datasheet.ciiva.com/6293/tdkmlcccaprange-6293708.pdf, ComponentLink9URL=https://datasheet.ciiva.com/6293/tdkmlcccaprange-6293708.pdf, Depth=0.8mm, Height=0.8mm, Lead Free="Lead Free", Length=1.6mm, Manufacturer Part Number=C1608C0G1H220J080AA, Mount="Surface Mount", Number of Pins=2, Packaging="Tape and Reel", Pricing 1="1=0.12, 10=0.089, 100=0.0394, 500=0.02818, 1000=0.02214 (USD)", Radiation Hardening=No, REACH SVHC=Unknown, Stock 1=0, Supplier 1=Digi-Key, Termination=SMD/SMT, Thickness=0.037inch, Voltage Rating=50V, Voltage Rating (DC)=50V, Weight=7.1E-05oz, Width=0.031inch
C34 C35 C37 C38 C39: library part LMK107BJ106MALTD, "CAP CER 10UF 10V X5R 0603", Capacitance=10uF, Case/Package=0603, Case Code (Metric)=1608, Dielectric=X5R, Manufacturer="Taiyo Yuden", Max Operating Temperature=85°C, Min Operating Temperature=-55°C, Package Quantity=4000, Supplier Part Number 1=587-2562-6-ND, Tolerance=20%, Voltage Rating=10V, Case Code (Imperial)=0603, ComponentLink1Description=https://datasheet.ciiva.com/140/mlcc-all-e-140192.pdf, ComponentLink1URL=https://datasheet.ciiva.com/140/mlcc-all-e-140192.pdf, ComponentLink2Description=https://datasheet.ciiva.com/140/mlcc-all-e-140193.pdf, ComponentLink2URL=https://datasheet.ciiva.com/140/mlcc-all-e-140193.pdf, ComponentLink3Description=https://datasheet.ciiva.com/22694/1784412-22694257.pdf, ComponentLink3URL=https://datasheet.ciiva.com/22694/1784412-22694257.pdf, ComponentLink4Description=https://datasheet.ciiva.com/140/mlcc-all-e-140194.pdf, ComponentLink4URL=https://datasheet.ciiva.com/140/mlcc-all-e-140194.pdf, ComponentLink5Description=https://datasheet.ciiva.com/15921/288lmk107bbj106malt-15921300.pdf, ComponentLink5URL=https://datasheet.ciiva.com/15921/288lmk107bbj106malt-15921300.pdf, ComponentLink6Description=https://datasheet.ciiva.com/7975/1784412-7975562.pdf, ComponentLink6URL=https://datasheet.ciiva.com/7975/1784412-7975562.pdf, ComponentLink7Description=https://datasheet.ciiva.com/5414/mlcc-all-e-541559-5414109.pdf, ComponentLink7URL=https://datasheet.ciiva.com/5414/mlcc-all-e-541559-5414109.pdf, ComponentLink8Description=https://datasheet.ciiva.com/7975/mlcc-all-e-7975775.pdf, ComponentLink8URL=https://datasheet.ciiva.com/7975/mlcc-all-e-7975775.pdf, Composition=Ceramic, Height=0.8mm, Lead Free="Lead Free", Length=1.6mm, Manufacturer Part Number=LMK107BJ106MALTD, Mount="Surface Mount", Number of Pins=2, Packaging="Tape and Reel", Pricing 1="1=0.62, 10=0.431, 100=0.2588, 500=0.19406, 1000=0.16388 (USD)", REACH SVHC=Unknown, Stock 1=40000, Supplier 1=Digi-Key, Termination=SMD/SMT, Thickness=0.035inch, Voltage Rating (DC)=10V, Width=0.031inch
C40: library part GRM188R71A225KE15D, "CAP CER 2.2UF 10V X7R 0603", Capacitance=2.2uF, Case/Package=0603, Case Code (Metric)=1608, Dielectric=X7R, Manufacturer=Murata, Max Operating Temperature=125°C, Min Operating Temperature=-55°C, Package Quantity=1, Supplier Part Number 1=490-4520-6-ND, Tolerance=10%, Voltage=10V, Case Code (Imperial)=0603, ComponentLink1Description=https://datasheet.ciiva.com/138/product-138560.pdf, ComponentLink1URL=https://datasheet.ciiva.com/138/product-138560.pdf, ComponentLink2Description=https://datasheet.ciiva.com/138/grm188r71a225ke15-01-138561.pdf, ComponentLink2URL=https://datasheet.ciiva.com/138/grm188r71a225ke15-01-138561.pdf, ComponentLink3Description=https://datasheet.ciiva.com/3778/302grm188r71a225ke1523-3778402.pdf, ComponentLink3URL=https://datasheet.ciiva.com/3778/302grm188r71a225ke1523-3778402.pdf, ComponentLink4Description=https://datasheet.ciiva.com/22703/1697709-22703330.pdf, ComponentLink4URL=https://datasheet.ciiva.com/22703/1697709-22703330.pdf, ComponentLink5Description=https://datasheet.ciiva.com/16389/product-16389723.pdf, ComponentLink5URL=https://datasheet.ciiva.com/16389/product-16389723.pdf, ComponentLink6Description=https://datasheet.ciiva.com/11789/0900766b80ef921d-11789118.pdf, ComponentLink6URL=https://datasheet.ciiva.com/11789/0900766b80ef921d-11789118.pdf, ComponentLink7Description=https://datasheet.ciiva.com/138/grm188r71a225ke15-01-138559.pdf, ComponentLink7URL=https://datasheet.ciiva.com/138/grm188r71a225ke15-01-138559.pdf, ComponentLink8Description=https://datasheet.ciiva.com/29199/454488-da-01-en-vs-kondensator-0603-29199701.pdf, ComponentLink8URL=https://datasheet.ciiva.com/29199/454488-da-01-en-vs-kondensator-0603-29199701.pdf, Depth=0.8mm, Height=0.8mm, Lead Free="Lead Free", Length=1.6mm, Manufacturer Part Number=GRM188R71A225KE15D, Material=Ceramic, Mount="Surface Mount", Number of Pins=2, Packaging="Cut Tape", Pricing 1="1=0.45, 10=0.313, 100=0.188, 500=0.14102, 1000=0.11908 (USD)", REACH SVHC="No SVHC", Stock 1=0, Supplier 1=Digi-Key, Termination=SMD/SMT, Thickness=0.035inch, Voltage Rating=10V, Voltage Rating (DC)=10V, Weight=7.1E-05oz, Width=0.031inch
D1: library part CMP-1055-00232-1, "Schottky Barrier Diode, 2-Pin DSN, Pb-Free, Tape and Reel", Manufacturer="On Semiconductor", ComponentLink1Description="Manufacturer URL", ComponentLink1URL=http://www.onsemi.com/, ComponentLink2Description=Datasheet, ComponentLink2URL=http://www.onsemi.cn/pub_link/Collateral/NSR05F40.PDF, ComponentLink3Description="Package Specification", ComponentLink3URL=http://www.onsemi.cn/pub_link/Collateral/152AC.PDF, Configuration=Single, DatasheetVersion="Rev. 3", IFSM Max (A)=10, Mounting Technology="Surface Mount", PackageDescription="2-Pin Micro Molded Package, Body 1 x 0.6 mm", PackageReference=DSN-2-152AC-01, PackageVersion="Rev. C, 01/2011", Packing="Tape and Reel", PartNumber=NSR05F40NXT5G, RoHS=TRUE
DS1 DS2 DS3 DS4 DS5 DS6 DS7 DS8: library part CMP-0239-00002-1, "LED, SMT, 0603(1608), 0.25mm Tthickness, Super Bright Orange", Forward Current="30 mA", Power Dissipation="75 mW", Reverse Voltage="5 V", Storage Temperature="-40 to 85 degC", ComponentLink1Description="Manufacturer URL", ComponentLink1URL=http://www.kingbrightusa.com/, ComponentLink2Description=Datasheet, ComponentLink2URL=http://www.kingbrightusa.com/images/catalog/SPEC/APG1608SEKC-T.pdf, DatasheetVersion="Rev. 4A, 12/2011", Mounting Technology="Surface Mount", PackageDescription="2-Pin SMT LED, 1.6 x 0.8 mm Body, 0.25mm Thickness", PackageReference=LED0603-25-ORANGE, PackageVersion="Rev. 4A, 12/2011", Packing=Reel, PartNumber=APG1608SEKC/T
DS9: library part CMP-0239-00001-1, "LED, SMT, 0603(1608), 0.25mm Thickness, Green", Forward Current="30 mA", Power Dissipation="78 mW", Reverse Voltage="5 V", Storage Temperature="-40 to 85 degC", ComponentLink1Description="Manufacturer URL", ComponentLink1URL=http://www.kingbrightusa.com/, ComponentLink2Description=Datasheet, ComponentLink2URL=http://www.kingbrightusa.com/images/catalog/SPEC/APG1608CGKC-T.pdf, DatasheetVersion="Rev. 5B, 10/2012", Mounting Technology="Surface Mount", PackageDescription="2-Pin SMT LED, 1.6 x 0.8 mm Body, 0.25mm Thickness", PackageReference=LED0603-25-GREEN, PackageVersion="Rev. 5B, 10/2012", Packing=Reel, PartNumber=APG1608CGKC/T
FB1 FB2 FB3 FB4 FB5: library part CMP-0686-00436-2, "Chip Ferrite Bead for General Use, 600 Ohm, 500 mA, -55 to 125 degC, 1.6 x 0.8 x 0.95 mm SMD, Tape and Reel", DC Resistance="0.38 Ohm Max.", Manufacturer=Murata, Operating Temperature Range="-55 to 125 degC", Rated Current="500 mA", ComponentLink1Description="Manufacturer URL", ComponentLink1URL=http://www.murata.com/, ComponentLink2Description=Datasheet, ComponentLink2URL=http://www.murata.com/products/catalog/pdf/c31e.pdf, ComponentLink3Description="Package Specification", ComponentLink3URL=http://www.murata.com/products/catalog/pdf/c31e.pdf, DatasheetVersion=08/2013, Impedance (at 100 MHz)="600 Ohm +/- 25%", Mounting Technology="Surface Mount", PackageDescription="2-Pin Chip, Body 1.6 x 0.8 mm", PackageReference=BLM18_H950-2, Packing="Tape and Reel", PartNumber=BLM18AG601SN1D
J1: library part CMP-2000-05827-1, "Micro-USB B Receptacle, Right Angle, Bottom Mount, Surface Mount, with Solder Tabs, -30 to 85 degC, 5-Pin USB, RoHS, Tape and Reel", Manufacturer=Molex, Package Description="5-Leads USB, Micro B, Body 7.5 x 5 mm, Pitch 0.65 mm", Package Reference=MICRO-B, Package Version="Rev. F, 12/2012", Standard Package=1, Voltage - Max=30V, 3D Model=105017-0001.stp, Catalog Drawings=1050170001, Category=Connectors,Interconnects, Circuits=5, Connector Type=USB-microB, Datasheet URL=http://www.molex.com/elqNow/elqRedir.htm?ref=http://www.molex.com/webdocs/datasheets/pdf/en-us/1050170001_IO_CONNECTORS.pdf, Datasheet Version=03/2016, Family=USB,DVI,HDMIConnectors, Featured Product=Micro-USBConnectorsUSBConnectors, Features=Shielded,SolderRetention, Gender=Receptacle, Ingress Protection=-, Manufacturer URL=http://www.molex.com/, Mating Products=WM17145-ND-CABLEMICROUSBBTOSTDA1.0MWM17147-ND-CABLEMICROUSBBTOSTDA2.0MWM17146-ND-CABLEMICROUSBBTOSTDA1.5M, Mounting Technology=SurfaceMount, Mounting Type=BoardCutout,SurfaceMount,RightAngle, Number of Contacts=5, Online Catalog=Molex-MicroUSB, Other Names=WM1399DKR, Package URL=http://www.molex.com/pdm_docs/sd/1050170001_sd.pdf, Packaging=Digi-Reel®, PCN Assembly/Origin=ResinSupplier21/Oct/2015, RoHS Information=1050170001CertofCompliance, Series=-, Specifications=-
J2: "CONN FFC FPC 40POS 0.50MM R/A", Current Rating=500mA, Flammability Rating="UL94 V-0", Manufacturer=Panasonic, Max Operating Temperature=85°C, Min Operating Temperature=-55°C, Package Quantity=1000, Supplier Part Number 1=255-3484-2-ND, Voltage Rating=50V, Actuator Material="Polymer,Liquid Crystal Polymer", ComponentLink1Description=http://components.arrow.com/part/dataview/0323_03238277, ComponentLink1URL=http://components.arrow.com/part/dataview/0323_03238277, ComponentLink2Description=http://www.mouser.com/ds/2/315/Panasonic_Y5B_Y5BW%20Series-1076217.pdf, ComponentLink2URL=http://www.mouser.com/ds/2/315/Panasonic_Y5B_Y5BW%20Series-1076217.pdf, ComponentLink3Description=http://www3.panasonic.biz/ac/e_download/control/connector/fpc-ffc/catalog/con_eng_y5bw.pdf, ComponentLink3URL=http://www3.panasonic.biz/ac/e_download/control/connector/fpc-ffc/catalog/con_eng_y5bw.pdf, Contact Location=Dual, Contact Material="Copper Alloy", Contact Plating=Gold, Housing Material=Polymer, Manufacturer Part Number=AYF534035, Mount="Surface Mount", Number of Positions=40, Packaging="Tape and Reel", Pitch=0.02inch, Pricing 1="5000=1.1438 (USD)", Stock 1=10000, Supplier 1=Digi-Key, Termination=Solder
J3: "CONN FFC FPC 6POS 0.50MM R/A", Contact Resistance=80mR, Current Rating=500mA, Flammability Rating="UL94 V-0", Manufacturer=Panasonic, Max Operating Temperature=85°C, Max Voltage Rating (DC)=5.05kV, Min Operating Temperature=-55°C, Package Quantity=1, Supplier Part Number 1=255-3057-2-ND, Voltage Rating=50V, Actuator Material="Polymer,Liquid Crystal Polymer", ComponentLink1Description=https://datasheet.ciiva.com/15249/eng-y5bw-15249222.pdf, ComponentLink1URL=https://datasheet.ciiva.com/15249/eng-y5bw-15249222.pdf, Contact Location=Dual, Contact Material="Copper Alloy", Contact Plating=Gold, Housing Material=Polymer, Manufacturer Part Number=AYF530635, Mount="Surface Mount", Number of Contacts=6, Number of Positions=6, Number of Rows=1, Orientation="Right Angle", Packaging="Tape and Reel", Pitch=0.5mm, Pricing 1="5000=0.798, 10000=0.78 (USD)", Radiation Hardening=No, Stock 1=0, Supplier 1=Digi-Key, Termination=Solder
J4: "Pin header 12P, 610112249121, Würth Elektronik", Colour=Black, Current Rating=3A, Manufacturer="Wurth Electronics", Supplier Part Number 1=732-6070-2-ND, ComponentLink1Description=http://katalog.we-online.de/em/datasheet/6101xx249121.pdf, ComponentLink1URL=http://katalog.we-online.de/em/datasheet/6101xx249121.pdf, ComponentLink2Description=https://www.distrelec.bizhttp://katalog.we-online.de/em/datasheet/6101xx249121.pdf?mime=application%2Fpdf, ComponentLink2URL=https://www.distrelec.bizhttp://katalog.we-online.de/em/datasheet/6101xx249121.pdf?mime=application%2Fpdf, ComponentLink3Description=http://www.farnell.com/cad/1889791.pdf, ComponentLink3URL=http://www.farnell.com/cad/1889791.pdf, Connector Type="Male Pin", Contact Material="Copper Alloy", Contact Mating Length=0.236inch, Contact Plating=Gold, Gender=Male, Manufacturer Part Number=610112249121, Mount="Surface Mount", Number of Contacts=12, Number of Positions=12, Number of Rows=2, Packaging="Cut Tape", Pitch=0.1inch, Pricing 1="350=1.884, 700=1.64901 (USD)", REACH SVHC=Unknown, Row Spacing=0.1inch, Stock 1=0, Supplier 1=Digi-Key, Termination=Solder
L1 L2: library part CMP-0007-00003-1, "Semi-shielded Power Inductor, 2.2 uH, +/- 20%, 1.8 A, -40 to 125 degC, 3 x 3 x 1.5 mm SMD, RoHS and Halogen Free, Tape and Reel", Inductance="2.2 uH", Inductance tolerance="+/- 20%", Manufacturer=Bourns, Operating Temperature="-40 to 125 degC", Rated Current="1.8 A", Resistance to Solder Heat="+260 degC for 10 sec.", ComponentLink1Description="Manufacturer URL", ComponentLink1URL=http://www.bourns.com/, ComponentLink2Description=Datasheet, ComponentLink2URL=http://www.bourns.com/data/global/pdfs/SRN3015.pdf, ComponentLink3Description="Package Specification", ComponentLink3URL=http://www.bourns.com/data/global/pdfs/SRN3015.pdf, DatasheetVersion=Aug-11, DCR Max="0.072 Ohm", Isat="1.65 A", Mounting Technology="Surface Mount", PackageDescription="2-Pin SMD, Body 3 x 3 mm, Height 1.5 mm", PackageReference=SRN3015, Packing="Tape and Reel", PartNumber=SRN3015-2R2M, RoHS=TRUE, SRF Min="90 MHz"
L3: library part CMP-1747-00008-1, "Chip Inductor / , 10 uH, +/- 10%, -40 to 125 degC, 1210 (3225 Metric), RoHS, Tape and Reel", Colour=White, Current Rating="1.5 A", Inductance="10 uH", Max Operating Temperature="85 degC", Min Operating Temperature="-55 degC", Package Quantity=100, ComponentLink1Description="Manufacturer URL", ComponentLink1URL=http://www.bourns.com/, ComponentLink2Description=Datasheet, ComponentLink2URL=http://www.bourns.com/docs/Product-Datasheets/cm322522.pdf, Connector Type=USB, Contact Material=Bronze, Contact Plating=Gold, DatasheetVersion=Aug-14, Gender=Female, Height="15.9 mm", Lead Pitch="2.5 mm", Mount="Through Hole", PackageDescription="2-Pin Surface Mount Device, Body 3.2 x 2.5 mm", PackageReference=1210, Packaging=Tray, Pins=4, Radiation Hardening=No, RoHSCompliant=true, Width="11.15 mm"
R1 R2 R3: library part RC0402FR-075K1L, "RES SMD 5.1K OHM 1% 1/16W 0402", Case/Package=0402, Case Code (Metric)=1005, Manufacturer=Yageo, Max Operating Temperature=155°C, Max Power Dissipation=63mW, Min Operating Temperature=-55°C, Package Quantity=1, Resistance=5.1kR, Supplier Part Number 1=311-5.10KLRDKR-ND, Temperature Coefficient=100ppm/°C, Tolerance=1%, Voltage Rating=50V, Case Code (Imperial)=0402, ComponentLink1Description=https://datasheet.ciiva.com/15189/getdatasheetpartid-323636-15189493.pdf, ComponentLink1URL=https://datasheet.ciiva.com/15189/getdatasheetpartid-323636-15189493.pdf, ComponentLink2Description=https://datasheet.ciiva.com/2453/pyu-r-int-thick-7-2453400.pdf, ComponentLink2URL=https://datasheet.ciiva.com/2453/pyu-r-int-thick-7-2453400.pdf, ComponentLink3Description=https://datasheet.ciiva.com/46394/1018594-46394936.pdf, ComponentLink3URL=https://datasheet.ciiva.com/46394/1018594-46394936.pdf, ComponentLink4Description=https://datasheet.ciiva.com/2453/pyu-r-int-thick-7-2453401.pdf, ComponentLink4URL=https://datasheet.ciiva.com/2453/pyu-r-int-thick-7-2453401.pdf, ComponentLink5Description=https://datasheet.ciiva.com/2453/pyu-r-int-thick-7-2453402.pdf, ComponentLink5URL=https://datasheet.ciiva.com/2453/pyu-r-int-thick-7-2453402.pdf, ComponentLink6Description=https://datasheet.ciiva.com/16744/pyu-rc0402-51-rohs-l-6-r-16744283.pdf, ComponentLink6URL=https://datasheet.ciiva.com/16744/pyu-rc0402-51-rohs-l-6-r-16744283.pdf, ComponentLink7Description=https://datasheet.ciiva.com/12558/pyu-rc0402-51-rohs-l-6-r-8721-12558460.pdf, ComponentLink7URL=https://datasheet.ciiva.com/12558/pyu-rc0402-51-rohs-l-6-r-8721-12558460.pdf, ComponentLink8Description=https://datasheet.ciiva.com/7983/1018594-7983519.pdf, ComponentLink8URL=https://datasheet.ciiva.com/7983/1018594-7983519.pdf, Composition="Thick Film", Depth=0.5mm, Features="Moisture Resistant", Height=0.016inch, Lead Free="Lead Free", Length=1mm, Manufacturer Part Number=RC0402FR-075K1L, Military Standard=Not, Number of Terminations=2, Packaging="Tape and Reel", Power Rating=63mW, Pricing 1="1=0.1, 10=0.016, 100=0.0066, 1000=0.00299, 2500=0.00259, 5000=0.00214 (USD)", REACH SVHC=Unknown, Stock 1=0, Supplier 1=Digi-Key, Termination=SMD/SMT, Voltage Rating (DC)=50V, Width=0.02inch, Working Voltage=50V
R4 R5 R6: library part RC0402FR-072K2L, "YAGEO (PHYCOMP)         RC0402FR-072K2L             SMD Chip Resistor, Thick Film, 2.2 kohm, 50 V, 0402 [1005 Metric], 63 mW,  1%", Case/Package=0402, Case Code (Metric)=1005, Manufacturer=Yageo, Max Operating Temperature=155°C, Min Operating Temperature=-55°C, Power Rating=63mW, Resistance=2.2kR, Supplier Part Number 1=311-2.20KLRDKR-ND, Temperature Coefficient=100ppm/°C, Tolerance=1%, Voltage Rating=50V, Case Code (Imperial)=0402, ComponentLink1Description=https://datasheet.ciiva.com/11808/0900766b80c66297-11808786.pdf, ComponentLink1URL=https://datasheet.ciiva.com/11808/0900766b80c66297-11808786.pdf, ComponentLink2Description=https://datasheet.ciiva.com/12577/pyu-rc0402-51-rohs-l-6-r-12577429.pdf, ComponentLink2URL=https://datasheet.ciiva.com/12577/pyu-rc0402-51-rohs-l-6-r-12577429.pdf, ComponentLink3Description=https://datasheet.ciiva.com/16741/pyu-rc0402-51-rohs-l-6-r-16741015.pdf, ComponentLink3URL=https://datasheet.ciiva.com/16741/pyu-rc0402-51-rohs-l-6-r-16741015.pdf, ComponentLink4Description=https://datasheet.ciiva.com/7849/1018594-7849928.pdf, ComponentLink4URL=https://datasheet.ciiva.com/7849/1018594-7849928.pdf, ComponentLink5Description=https://datasheet.ciiva.com/7849/1018594-7849929.pdf, ComponentLink5URL=https://datasheet.ciiva.com/7849/1018594-7849929.pdf, ComponentLink6Description=https://datasheet.ciiva.com/7983/1018594-7983515.pdf, ComponentLink6URL=https://datasheet.ciiva.com/7983/1018594-7983515.pdf, ComponentLink7Description=https://datasheet.ciiva.com/46383/1018594-46383563.pdf, ComponentLink7URL=https://datasheet.ciiva.com/46383/1018594-46383563.pdf, Composition="Thick Film", Depth=0.5mm, Height=0.35mm, Lead Free="Lead Free", Length=1mm, Manufacturer Part Number=RC0402FR-072K2L, Military Standard=Not, Packaging="Tape and Reel", Pricing 1="1=0.1, 10=0.018, 100=0.0073, 1000=0.00329, 2500=0.00286, 5000=0.00236 (USD)", REACH SVHC=Unknown, Stock 1=0, Supplier 1=Digi-Key, Termination=SMD/SMT, Weight=2.3E-05oz, Width=0.5mm
R7: "RES SMD 12K OHM 1% 1/16W 0402", Case/Package=0402, Case Code (Metric)=1005, Manufacturer=Yageo, Max Operating Temperature=155°C, Max Power Dissipation=63mW, Min Operating Temperature=-55°C, Package Quantity=1, Power Rating=62.5mW, Resistance=12kR, Supplier Part Number 1=311-12.0KLRDKR-ND, Temperature Coefficient=100ppm/°C, Tolerance=1%, Voltage Rating=50V, Case Code (Imperial)=0402, ComponentLink1Description=https://datasheet.ciiva.com/2453/pyu-r-int-thick-7-2453379.pdf, ComponentLink1URL=https://datasheet.ciiva.com/2453/pyu-r-int-thick-7-2453379.pdf, ComponentLink2Description=https://datasheet.ciiva.com/2453/pyu-r-int-thick-7-2453380.pdf, ComponentLink2URL=https://datasheet.ciiva.com/2453/pyu-r-int-thick-7-2453380.pdf, ComponentLink3Description=https://datasheet.ciiva.com/2453/pyu-r-int-thick-7-2453381.pdf, ComponentLink3URL=https://datasheet.ciiva.com/2453/pyu-r-int-thick-7-2453381.pdf, ComponentLink4Description=https://datasheet.ciiva.com/12577/pyu-rc0402-51-rohs-l-6-r-12577269.pdf, ComponentLink4URL=https://datasheet.ciiva.com/12577/pyu-rc0402-51-rohs-l-6-r-12577269.pdf, ComponentLink5Description=https://datasheet.ciiva.com/7849/1018594-7849832.pdf, ComponentLink5URL=https://datasheet.ciiva.com/7849/1018594-7849832.pdf, ComponentLink6Description=https://datasheet.ciiva.com/7849/1018594-7849833.pdf, ComponentLink6URL=https://datasheet.ciiva.com/7849/1018594-7849833.pdf, ComponentLink7Description=https://datasheet.ciiva.com/16744/pyu-rc0402-51-rohs-l-6-r-16744492.pdf, ComponentLink7URL=https://datasheet.ciiva.com/16744/pyu-rc0402-51-rohs-l-6-r-16744492.pdf, ComponentLink8Description=https://datasheet.ciiva.com/46412/1018594-46412831.pdf, ComponentLink8URL=https://datasheet.ciiva.com/46412/1018594-46412831.pdf, Composition="Thick Film", Depth=0.5mm, Features="Moisture Resistant", Height=0.016inch, Lead Free="Lead Free", Length=1mm, Manufacturer Part Number=RC0402FR-0712KL, Military Standard=Not, Number of Terminations=2, Packaging="Tape and Reel", Pricing 1="1=0.1, 10=0.018, 100=0.0073, 1000=0.00329, 2500=0.00286, 5000=0.00236 (USD)", REACH SVHC="No SVHC", Stock 1=0, Supplier 1=Digi-Key, Termination=SMD/SMT, Weight=2.3E-05oz, Width=0.02inch